# Altium PCB PCB2.PcbDoc
Units mm, origin at the board's own origin, x right, y up, seen from the top; angles counter-clockwise.
Board outline 19.96 x 19.96 mm, 2 copper layers (Top Layer, Bottom Layer); 6 components, 5 nets, 19 pads, 0 vias.
Unrouted connection lines stored in the file: 1.
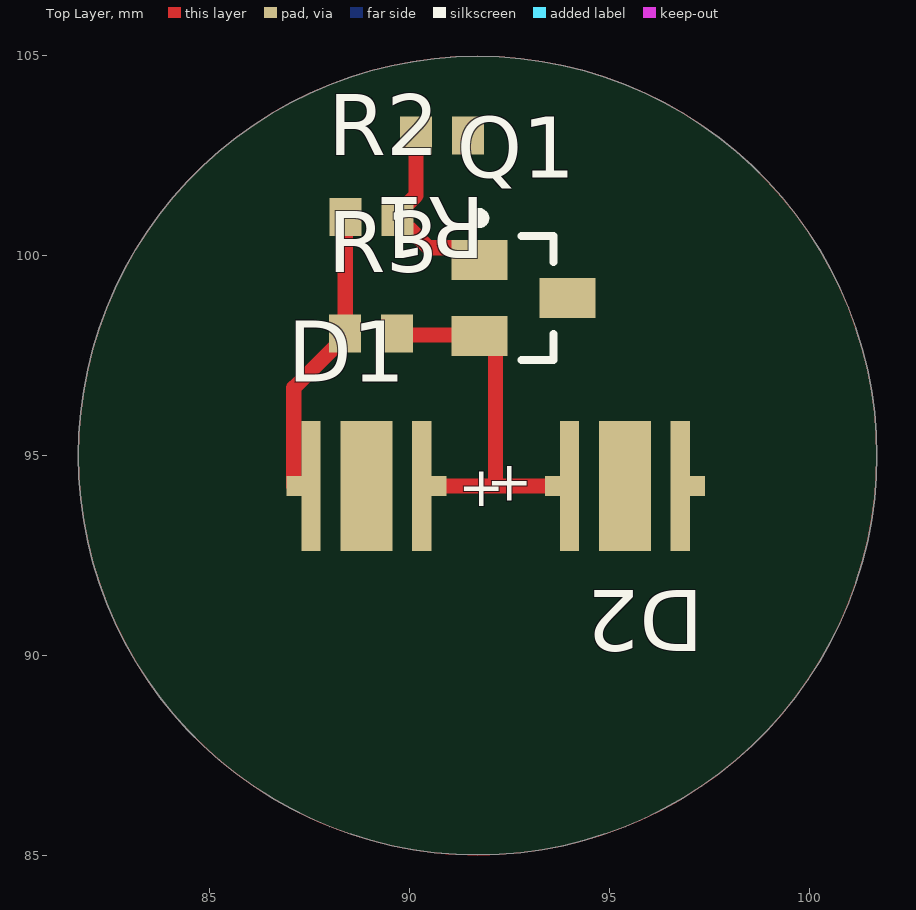
[diagram p0: Top Layer view]
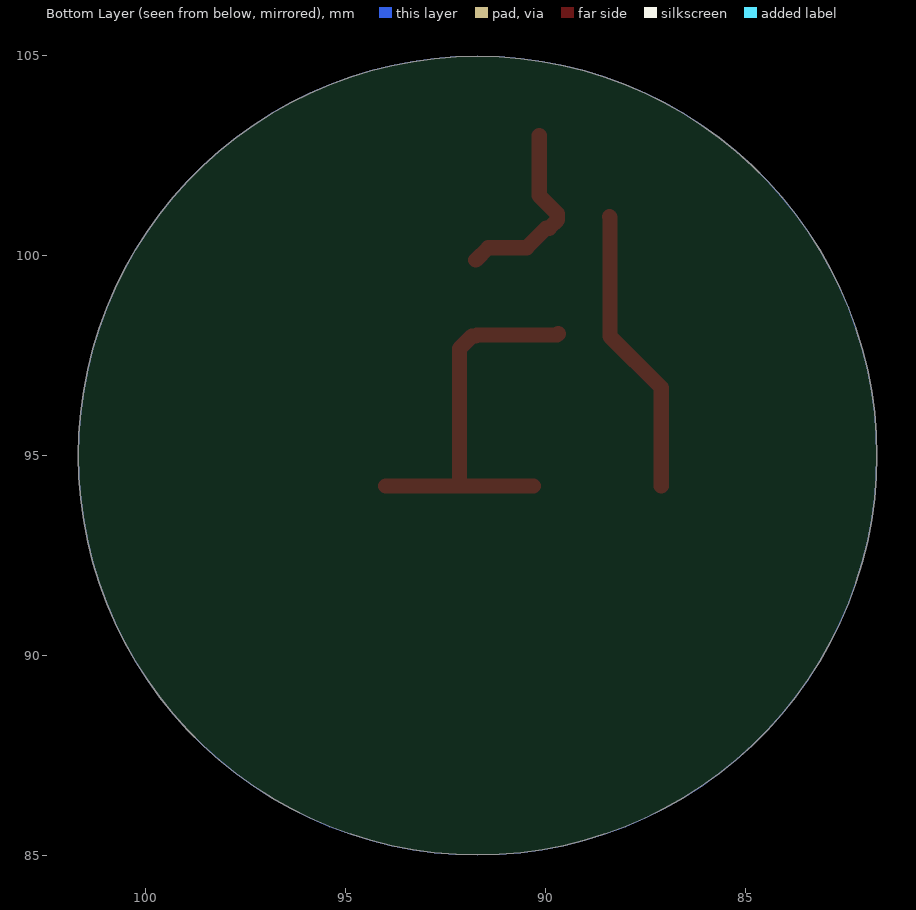
[diagram p1: Bottom Layer view, seen from below]

## Layer stack, top to bottom
Top Solder: solder mask 0.0102, Solder Resist, Dk 3.5
Top Layer: signal copper 0.0356
Dielectric 1: dielectric 0.32, FR-4, Dk 4.8
Bottom Layer: signal copper 0.0356
Bottom Solder: solder mask 0.0102, Solder Resist, Dk 3.5

## Board outline
91.694,85.014 cw(c91.694,94.996) 81.712,94.996 cw(c91.694,94.996) 91.694,104.978 cw(c91.694,94.996) 101.676,94.996 cw(c91.694,94.996)

## Design rules (kind name [scope] priority, off if disabled: settings)
Clearance Clearance_2 [InNamedPolygon('NONET_L02_P011')] p1: gap=0.381 ignorepadtopadclearanceinfootprint=FALSE
Clearance Clearance_1 [InNamedPolygon('5V2_L01_P010')] p2: gap=0.254 ignorepadtopadclearanceinfootprint=FALSE
Clearance [All] p3: gap=0.254 ignorepadtopadclearanceinfootprint=FALSE except(0: Arc-Hole Track-Hole SMDPad-Hole THPad-Hole Via-Hole Fill-Hole Poly-Hole Region-Hole Text-Hole)
PolygonConnect PolygonConnect_7 [All vs IsNamedPolygon('5V2_L01_P010')] p1: thpad.connectstyle=Direct thpad.reliefconductorwidth=0.254 thpad.reliefentries=4 thpad.polygonreliefangle="90 Angle" thpad.airgapwidth=0.254 smdpad.connectstyle=Relief smdpad.reliefconductorwidth=0.254 smdpad.reliefentries=4 smdpad.polygonreliefangle="90 Angle" smdpad.airgapwidth=0.254 via.connectstyle=Direct via.reliefconductorwidth=0.254 via.reliefentries=4 via.polygonreliefangle="90 Angle" via.airgapwidth=0.254
PolygonConnect PolygonConnect_6 [All vs IsNamedPolygon('NONET_L02_P011')] p2: thpad.connectstyle=Direct thpad.reliefconductorwidth=0.254 thpad.reliefentries=4 thpad.polygonreliefangle="90 Angle" thpad.airgapwidth=0.254 smdpad.connectstyle=Relief smdpad.reliefconductorwidth=0.254 smdpad.reliefentries=4 smdpad.polygonreliefangle="90 Angle" smdpad.airgapwidth=0.254 via.connectstyle=Relief via.reliefconductorwidth=0.254 via.reliefentries=4 via.polygonreliefangle="90 Angle" via.airgapwidth=0.254
PolygonConnect PolygonConnect_5 [All vs IsNamedPolygon('5V2_L01_P010')] p3: thpad.connectstyle=Direct thpad.reliefconductorwidth=0.254 thpad.reliefentries=4 thpad.polygonreliefangle="90 Angle" thpad.airgapwidth=0.254 smdpad.connectstyle=Relief smdpad.reliefconductorwidth=0.254 smdpad.reliefentries=4 smdpad.polygonreliefangle="90 Angle" smdpad.airgapwidth=0.254 via.connectstyle=Relief via.reliefconductorwidth=0.254 via.reliefentries=4 via.polygonreliefangle="90 Angle" via.airgapwidth=0.254
PolygonConnect PolygonConnect_4 [All vs IsNamedPolygon('OHLAD_L01_P009')] p4: connectstyle=Direct reliefconductorwidth=0.254 reliefentries=4 polygonreliefangle="90 Angle" airgapwidth=0.254
PolygonConnect PolygonConnect_3 [All vs IsNamedPolygon('OHLAD_L01_P009')] p5: thpad.connectstyle=Direct thpad.reliefconductorwidth=0.254 thpad.reliefentries=4 thpad.polygonreliefangle="90 Angle" thpad.airgapwidth=0.254 smdpad.connectstyle=Relief smdpad.reliefconductorwidth=0.254 smdpad.reliefentries=4 smdpad.polygonreliefangle="90 Angle" smdpad.airgapwidth=0.254 via.connectstyle=Relief via.reliefconductorwidth=0.254 via.reliefentries=4 via.polygonreliefangle="90 Angle" via.airgapwidth=0.254
PolygonConnect PolygonConnect_2 [All vs IsNamedPolygon('5V2_L01_P010')] p6: connectstyle=Direct reliefconductorwidth=0.254 reliefentries=4 polygonreliefangle="90 Angle" airgapwidth=0.254
PolygonConnect PolygonConnect_1 [All vs IsNamedPolygon('5V2_L01_P010')] p7: connectstyle=Relief reliefconductorwidth=0.381 reliefentries=4 polygonreliefangle="90 Angle" airgapwidth=0.254
PolygonConnect [All] p8: connectstyle=Relief reliefconductorwidth=0.254 reliefentries=4 polygonreliefangle="90 Angle" airgapwidth=0.254
RoutingVias [All] p1: holewidth=0.711 width=1.27 viastyle="Through Hole" minholewidth=0.711 minwidth=1.27 maxholewidth=0.711 maxwidth=1.27
SolderMaskExpansion [All] p1: expansion=0.102 istentingtop=FALSE
Width [All] p1: maxlimit=0.508 minlimit=0.381 preferedwidth=0.381 minimp=50.000000 maximp=50.000000 favimp=50.000000
30 further rules are at their usual default settings.

## Components (designator, comment, footprint, x,y, rotation, side; value= is the part's Value field where it differs from the comment)
D1 "15335338AA350" "WL-SUMW_3535 UV-A_L3.4W3.4H2.1" 1358.912,1364.234 r0 top
D2 "15335338AA350" "WL-SUMW_3535 UV-A_L3.4W3.4H2.1" -1174.626,-1175.766 r180 top
Q1 "FDV303N" FAIR-FDV303N-3_V 92.837,98.933 r0 top
R1 "470" RESC1609X50X30NL8T20 90.805,102.997 r180 top
R2 "10k" RESC1609X50X30NL8T20 89.044,100.965 r0 top
R3 "10k" RESC1609X50X30NL8T20 89.027,98.044 r0 top

## Footprints (in the part's own frame and the unit in brackets; to place one, negate y for a bottom-side part, rotate by r counter-clockwise, add the part's x,y. Pads: shape width x height; smd on the part's side, far side on the other; paste and mask are expansions set on the pad)
FAIR-FDV303N-3_V [mm] "SOT23, 3-Leads, Body 3.12x1.50mm, Pitch 0.95mm"
  rect 1.4x1 smd: 1(-1.1,0.95) 2(-1.1,-0.95) 3(1.1,0)
  silkscreen extent -1.22,-1.55 0.75,2.12, body extent -0.75,-1.56 0.75,1.56, height 1.2
RESC1609X50X30NL8T20 [mm] "Chip Resistor, 2-Leads, Body 1.65x0.95mm, IPC Medium Density"
  rect 0.8x0.95 smd: 1(-0.65,0) 2(0.65,0)
  body extent -0.82,-0.48 0.82,0.48, height 0.5
"WL-SUMW_3535 UV-A_L3.4W3.4H2.1" [mm] "SMD Ultraviolet Ceramic Waterclear, body 3.40x3.40mm"
  rect 0.375x0.5 smd: 1(-1271.813,-1270) 2(-1268.187,-1270)
  rect 0.48x3.25 smd: 1(-1271.385,-1270) 2(-1268.615,-1270)
  rect 1.3x3.25 smd: 3(-1270,-1270)
  body extent -1271.7,-1271.7 -1268.3,-1268.3, height 2.1

## Part data
D1 D2: library part CMP-03913-78125603-1, "15335338AA350 WL-SUMW SMT UltraViolet Ceramic Waterclear", Forward Current=1A, Forward Voltage=3.5V, Max Operating Temperature=85°C, Min Operating Temperature=-40°C, Height=2mm, Length=3.45mm, NexarPartId=78125603, Packaging="Tape and Reel", Peak Wavelength=385nm, RoHS=Compliant, Viewing Angle=130°, Wavelength=385nm, Width=3.45mm
Q1: library part CMP-2000-05111-1, "N-Channel MOSFET Transistor, 8 V VGSS, 25 V VDSS, 0.68 A, -55 to 150 degC, 3-Pin SOT23, RoHS, Tape and Reel", Manufacturer=Fairchild, Maximum Continuous Drain Current=0.68A, Maximum Drain Source Voltage=25V, Maximum Gate Source Voltage=8V, Operating Temperature=-55to150degC, Package=3SOT-23, Category=MOSFET, Channel Mode=Enhancement, Channel Type=N, Datasheet URL=https://datasheet.ciiva.com/22681/1845307-22681736.pdf, Datasheet Version="Rev. D2, 07/2014", Manufacturer URL=https://www.fairchildsemi.com/, Mounting=SurfaceMount, Packaging=Tape&Reel, Rad Hard=No, RDS-on=450@4.5VmOhm, Typical Fall Time=13ns, Typical Rise Time=8.5ns, Typical Turn-Off Delay Time=17ns, Typical Turn-On Delay Time=3ns
R1 R2 R3: library part CMP-2000-03816-5, "Chip Resistor, 0 Ohm, Jumper, 100 mW, -55 to 155 degC, 0603 (1608 Metric), RoHS, Tape and Reel", Manufacturer="Vishay Semiconductor", Max Operating Temperature="155 degC", Min Operating Temperature="-55 degC", Package Quantity=5000, Voltage Rating="75 V", ComponentLink1Description="Manufacturer URL", ComponentLink1URL=http://www.vishay.com/, ComponentLink2Description=Datasheet, ComponentLink2URL=http://www.vishay.com/docs/20035/dcrcwe3.pdf, DatasheetVersion=06/2012, Height="0.45 mm", Length="1.55 mm", Mount="Surface Mount", Mounting Technology="Surface Mount", PackageDescription="2-Pin Surface Mount Device, Body 1.575 x 0.85 mm", PackageReference=0603, Packaging="Tape and Reel", Pins=2, REACH SVHC=Unknown, RoHSCompliant=true

## Nets (pads, with @x,y where several pads share a name; then routed paths per layer and width w, separated by ;. In a path a pad name is that pad's centre, name@x,y a point inside that pad or via, vN(x,y) a via of type N, cw(c..) or ccw(c..) an arc to the next point about the centre after c; other vN are vias at no path point)
5V5: Q1.3
GND: D1.1 D2.1 R2.1 R3.1 | length 7.3
  Top Layer w0.381: D1.1@87.099,94.234 87.099,96.692 88.385,97.977 88.385,100.957 R2.1
NetD1_2: D1.2 D2.2 Q1.2 R3.2 | length 9.8
  Top Layer w0.381: R3.2 89.707,98.013 91.707,98.013 Q1.2 91.834,97.983 92.143,97.674 92.143,94.234 ; D1.2@90.297,94.234 90.724,94.234 92.143,94.234 ; D2.2@93.989,94.234 93.562,94.234 92.143,94.234
NetQ1_1: Q1.1 R1.2 R2.2 | length 4.8
  Top Layer w0.381: R1.2 90.155,101.501 89.694,101.04 R2.2 89.694,100.89 89.903,100.68 89.978,100.68 90.466,100.193 91.427,100.193 Q1.1
PWM: R1.1
pads on no net: D1.3 D2.3

## Polygon pours and split planes (outlines as drawn)
GND on Bottom Layer "NONET_L02_P011" (solid, shelved, pour order 11): 91.694,85.014 cw(c91.694,94.996) 81.712,94.996 cw(c91.694,94.996) 91.694,104.978 cw(c91.694,94.996) 101.676,94.996 cw(c91.694,94.996)
NetD1_2 on Top Layer "NONET_L01_P010" (solid, remove dead copper, shelved, pour order 10): 81.712,94.996 ccw(c91.694,94.996) 101.55,93.414 ccw(c91.695,94.996) 101.676,94.996 ccw(c91.694,94.996) 91.694,104.978 ccw(c91.694,94.996)

## Other copper
Top Layer:
  text "Top" at 88.265,108.204 h1.52

## Text inside footprints (layer, text, board x,y; h text height)
D1: Top Overlay "+" at 91.212,93.734 h1.02
D2: Top Overlay "+" at 93.074,94.734 h1.02 r180